# EAGLE board hp6060b v1.5 (EAGLE 9.5.1)
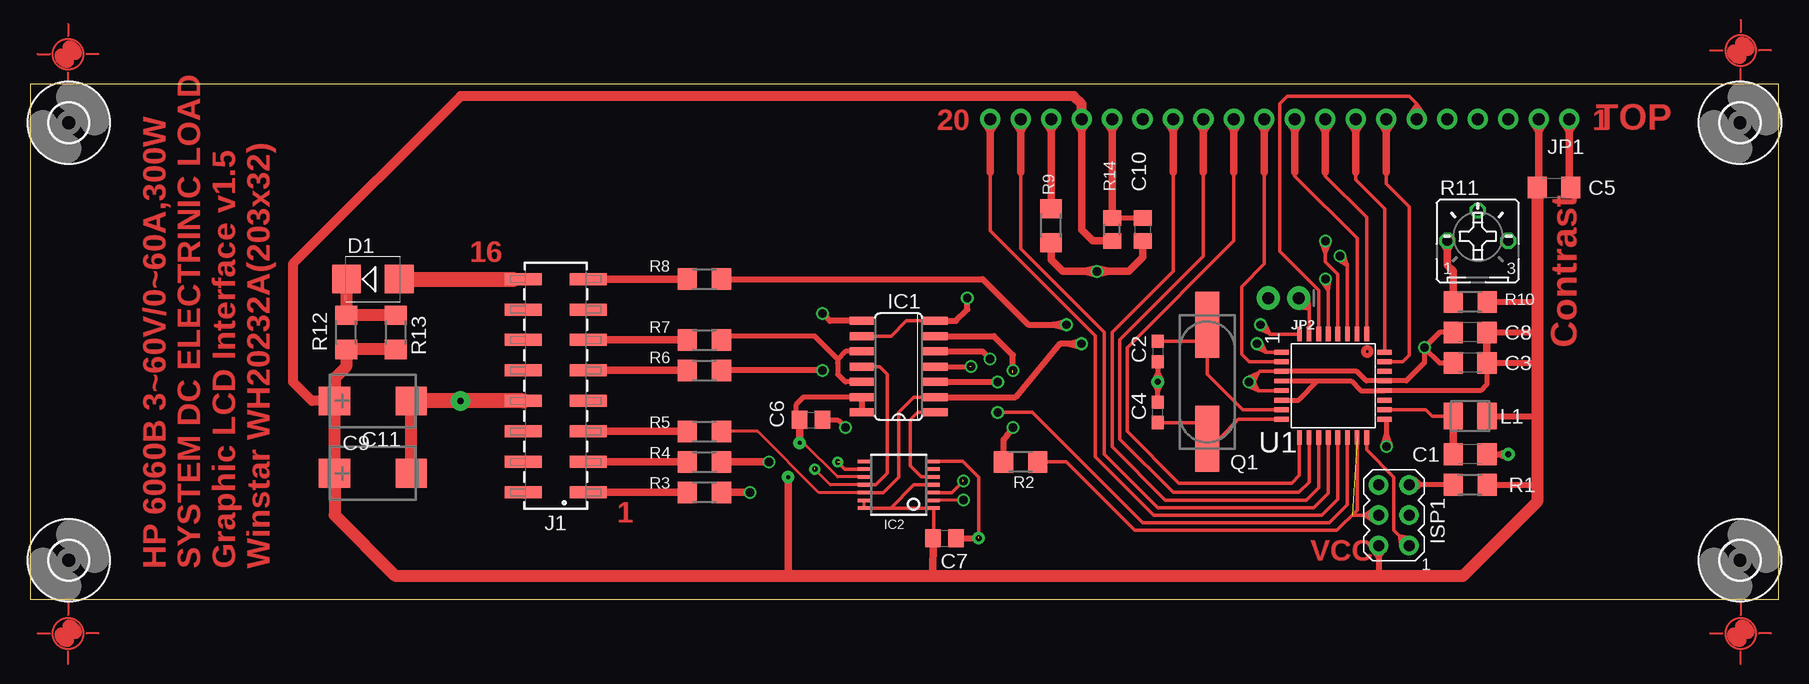
[diagram p0: board, top side]
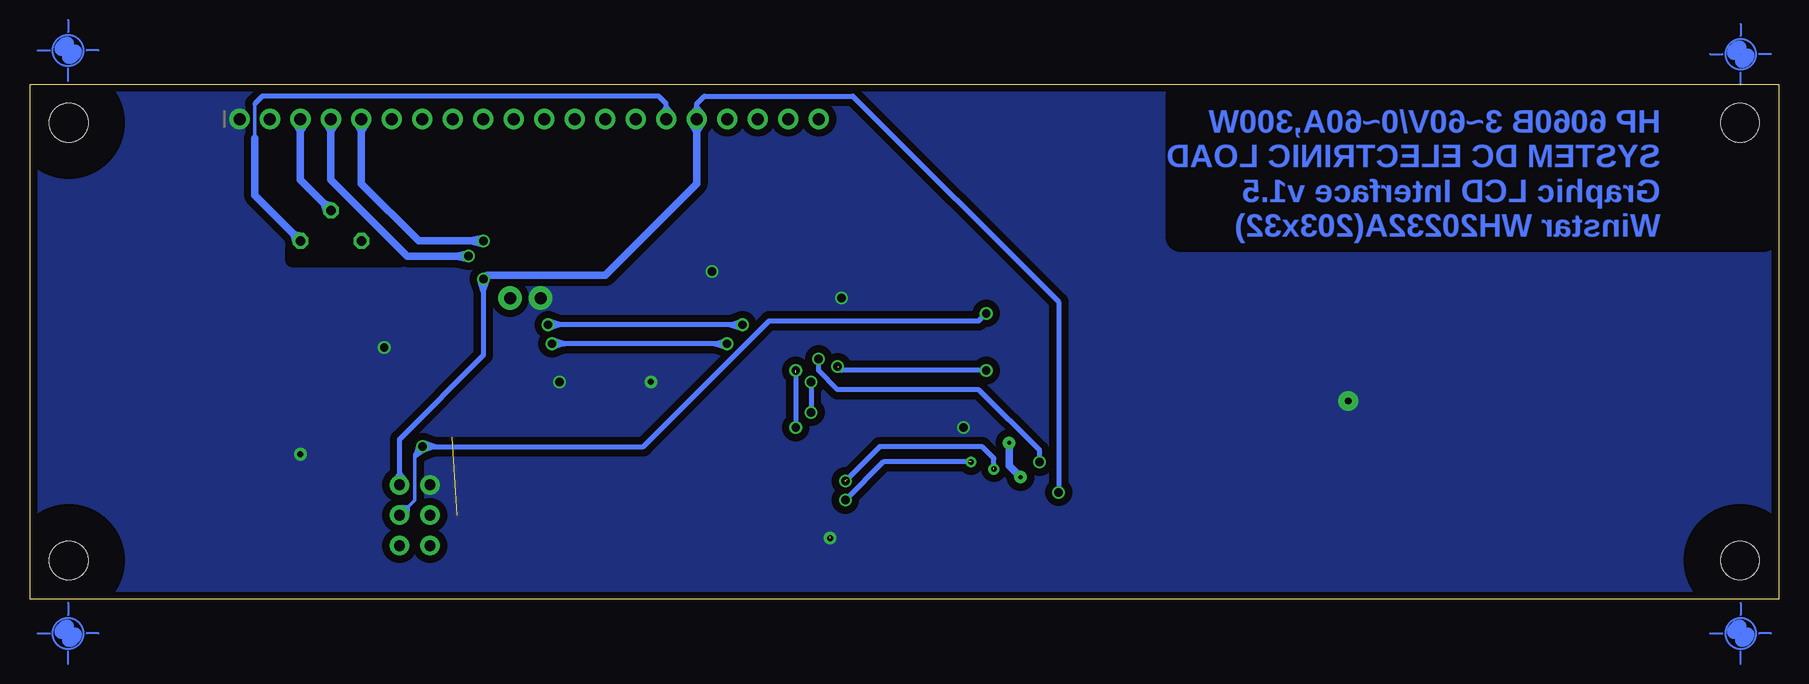
[diagram p1: board, bottom side, seen from below]

Size 145.73 x 42.92 mm. Coordinates in mm from the lower left corner, seen from the top.
Outline: 0,0 145.73,0 145.73,42.92 0,42.92 0,0
Copper layers (1*16): Top 0.035mm / dielectric 1.5mm / Bottom 0.035mm
Design rules "SeeedStudio_2layer_DRU_no_angle_20140221 *": minimum track width 6mil, minimum drill 12mil, track to track 6mil, track to pad 6mil, pad to pad 6mil, via to via 6mil, smd to smd 0mil, copper to edge 10mil, drill to drill 10mil, minimum pad ring 10mil, minimum via ring 6mil, stop-mask expansion 2mil, vias tented up to drill 100mil, thermal gap 10mil
bRestrict: area 114.9,28.3 to 123.8,29.2; area 1.3,30.2 to 49.8,41.9

## Footprints (pad centres in the part's own frame; a part is rotated, then mirrored left to right if it is on the bottom)
C1206 = smd 1.6 x 1.8: 1 -1.4,0; 2 1.4,0
C0603 = smd 1.1 x 1: 1 -0.85,0; 2 0.85,0
C0805 = smd 1.3 x 1.5: 1 -0.95,0; 2 0.95,0
CT7343 = smd 2.6 x 2.4: + -3.2,0; - 3.2,0
DIODE_SMB = smd 2.4 x 2.4: A 2.2,0; C -2.2,0
3,2 = hole 3.2: 0,0
SO14 = smd 0.66 x 2.032: 1 -3.81,-3.073; 2 -2.54,-3.073; 3 -1.27,-3.073; 4 0,-3.073; 5 1.27,-3.073; 6 2.54,-3.073; 7 3.81,-3.073; 8 3.81,3.073; 9 2.54,3.073; 10 1.27,3.073; 11 0,3.073; 12 -1.27,3.073; 13 -2.54,3.073; 14 -3.81,3.073
TSSOP-14 = smd 0.991 x 0.305: 1 -2.918,1.95; 2 -2.918,1.3; 3 -2.918,0.65; 4 -2.918,0; 5 -2.918,-0.65; 6 -2.918,-1.3; 7 -2.918,-1.95; 8 2.918,-1.95; 9 2.918,-1.3; 10 2.918,-0.65; 11 2.918,0; 12 2.918,0.65; 13 2.918,1.3; 14 2.918,1.95
AVRISP = drill 0.9 pad 1.626: 1 -1.27,2.54; 2 1.27,2.54; 3 -1.27,0; 4 1.27,0; 5 -1.27,-2.54; 6 1.27,-2.54
61001621121 = smd 1 x 3.1: 1 -8.89,-2.7; 2 -8.89,2.7; 3 -6.35,-2.7; 4 -6.35,2.7; 5 -3.81,-2.7; 6 -3.81,2.7; 7 -1.27,-2.7; 8 -1.27,2.7; 9 1.27,-2.7; 10 1.27,2.7; 11 3.81,-2.7; 12 3.81,2.7; 13 6.35,-2.7; 14 6.35,2.7; 15 8.89,-2.7; 16 8.89,2.7
1X20_ROUND = drill 1 pad 1.676: 1 -24.13,0; 2 -21.59,0; 3 -19.05,0; 4 -16.51,0; 5 -13.97,0; 6 -11.43,0; 7 -8.89,0; 8 -6.35,0; 9 -3.81,0; 10 -1.27,0; 11 1.27,0; 12 3.81,0; 13 6.35,0; 14 8.89,0; 15 11.43,0; 16 13.97,0; 17 16.51,0; 18 19.05,0; 19 21.59,0; 20 24.13,0
1X02_ROUND = drill 1 pad 1.93: 1 -1.27,0; 2 1.27,0
L3225M = smd 1.6 x 2.2: 1 -1.4,0; 2 1.4,0
CSM-7X-DU = smd 5.5 x 2: 1 -4.75,0; 2 4.75,0
R1206 = smd 1.6 x 1.803: 1 -1.422,0; 2 1.422,0
B25P = drill 0.813 octagon: A -2.54,0; E 2.54,0; S 0,2.54
R0805 = smd 1.3 x 1.5: 1 -0.95,0; 2 0.95,0
LQFP32 = smd 0.4 x 1.2: 1 -2.8,-4.3; 2 -2,-4.3; 3 -1.2,-4.3; 4 -0.4,-4.3; 5 0.4,-4.3; 6 1.2,-4.3; 7 2,-4.3; 8 2.8,-4.3; 17 2.8,4.3; 18 2,4.3; 19 1.2,4.3; 20 0.4,4.3; 21 -0.4,4.3; 22 -1.2,4.3; 23 -2,4.3; 24 -2.8,4.3 | smd 1.2 x 0.4: 9 4.3,-2.8; 10 4.3,-2; 11 4.3,-1.2; 12 4.3,-0.4; 13 4.3,0.4; 14 4.3,1.2; 15 4.3,2; 16 4.3,2.8; 25 -4.3,2.8; 26 -4.3,2; 27 -4.3,1.2; 28 -4.3,0.4; 29 -4.3,-0.4; 30 -4.3,-1.2; 31 -4.3,-2; 32 -4.3,-2.8

## Placement (x,y rotation side)
C1  0.1uF  [C1206]  120.02,12.06 180 top
C2  22pF  [C0603]  93.98,20.64 270 top
C3  0.1uF  [C1206]  120.02,19.68 180 top
C4  22pF  [C0603]  93.98,15.56 90 top
C5  0.1uF  [C1206]  127,34.29 0 top
C6  0.1uF  [C0805]  65.09,14.92 0 top
C7  0.1uF  [C0805]  76.2,5.08 0 top
C8  0.1uF  [C1206]  120.02,22.23 180 top
C9  22uF  [CT7343]  28.57,10.48 0 top
C10  0.1uF  [C0805]  92.71,30.8 270 top
C11  22uF  [CT7343]  28.57,16.51 0 top
D1  [DIODE_SMB]  28.57,26.67 0 top
FID1  PCB_FIDUCIALROUND  [PASS-ROUND]  3.17,-2.86 0 top
FID2  PCB_FIDUCIALROUND  [PASS-ROUND]  3.17,45.4 0 top
FID3  PCB_FIDUCIALROUND  [PASS-ROUND]  142.56,-2.86 0 top
FID4  PCB_FIDUCIALROUND  [PASS-ROUND]  142.56,45.72 0 top
H1  MOUNT-HOLE3.2  [3,2]  3.23,39.69 0 top
H2  MOUNT-HOLE3.2  [3,2]  3.23,3.23 0 top
H3  MOUNT-HOLE3.2  [3,2]  142.5,39.69 0 top
H4  MOUNT-HOLE3.2  [3,2]  142.5,3.23 0 top
IC1  74HC86D  [SO14]  72.39,19.37 90 top
IC2  AHC74  [TSSOP-14]  72.39,9.53 180 top
ISP1  AVRISP-6  [AVRISP]  113.67,6.99 180 top
J1  6060B_DISP  [61001621121]  43.81,17.78 90 top
JP1  WH20232A  [1X20_ROUND]  104.14,40.01 0 bottom
JP2  [1X02_ROUND]  104.46,25.08 180 top
L1  10uH  [L3225M]  120.02,15.24 180 top
Q1  16MHz  [CSM-7X-DU]  98.11,18.1 90 top
R1  10k  [R1206]  120.02,9.53 0 top
R2  1k  [R1206]  82.55,11.43 0 top
R3  0R  [R1206]  56.2,8.89 0 top
R4  2k  [R1206]  56.2,11.43 180 top
R5  2k  [R1206]  56.2,13.97 180 top
R6  2k  [R1206]  56.2,19.05 180 top
R7  2k  [R1206]  56.2,21.59 180 top
R8  2k  [R1206]  56.2,26.67 180 top
R9  120R  [R1206]  85.09,31.11 270 top
R10  10k  [R1206]  120.02,24.77 0 top
R11  5k  [B25P]  120.65,29.84 0 top
R12  100R  [R1206]  26.35,22.23 270 top
R13  100R  [R1206]  30.48,22.23 270 top
R14  120R  [R0805]  90.17,30.8 90 top
U1  IC_ATMEGA8  [LQFP32]  108.58,17.78 270 top

## Library data of the parts
C1 L1 = rcl
C2-C11 = rcl; SPICEPREFIX: C
D1 = eagle-ltspice; SPICEMODEL: NONE; SPICEPREFIX: D; SPICETYPE: diode
FID1-FID4 IC2 U1 = 0My
H1-H4 = holes
IC1 = 74xx-eu
ISP1 = 0adafruit
J1 = Wurth_Connectors_WR-PHD; DATASHEET-URL: https://katalog.we-online.com/em/datasheet/61001621121.pdf; GENDER: Pin Header; IR: 3A; MATES: WR-PHD 2.54mm Angled DualSocket Header/Dual Socket Header/Dual Socket Header Bottom Entry/Dual Socket Header Bottom Entry Large/SMT Dual Socket Header/SMT Dual Socket Header Bottom Entry; PACKAGING: Tube; PART-NUMBER: 61001621121; PINS: 16; ROWS: Dual; TYPE: Straight
JP1 JP2 = 0microbuilder
Q1 = crystal; OC_FARNELL: unknown; OC_NEWARK: unknown
R1-R10 R12-R14 = rcl; SPICEPREFIX: R
R11 = pot

## Nets
!PLCR: J1.1 R3.1
!RESET: C10.1 ISP1.5 JP1.16 R1.1 R3.2 R14.2 U1.29
!SS: IC1.3 U1.14
+5V: C3.1 C5.1 C6.1 C7.1 C8.1 C9.+ C11.+ IC1.13 IC1.14 IC2.1 IC2.4 IC2.10 IC2.13 IC2.14 ISP1.2 JP1.2 JP1.17 L1.1 R1.2 R10.2 R12.2 R13.2 R14.1 U1.4 U1.6 U1.20
AVCC: C1.2 L1.2 U1.18
DCLOCK: IC1.1 IC2.5
GND: C1.1 C2.2 C3.2 C4.2 C5.2 C6.2 C7.2 C8.2 C9.- C10.2 C11.- IC1.7 IC1.9 IC2.7 ISP1.6 J1.8 JP1.1 JP2.2 R9.2 U1.3 U1.5 U1.21
INA: IC1.4 R6.1
ISA: IC1.5 R4.1
K: JP1.18 R9.1
LCD_A0: JP1.4 U1.27
LCD_CS1: JP1.6 U1.30
LCD_CS2: JP1.19 U1.12
LCD_CS3: JP1.20 U1.13
LCD_DB0: JP1.7 U1.23
LCD_DB1: JP1.8 U1.24
LCD_DB2: JP1.9 U1.25
LCD_DB3: JP1.10 U1.26
LCD_DB4: JP1.11 U1.2
LCD_DB5: JP1.12 U1.9
LCD_DB6: JP1.13 U1.10
LCD_DB7: JP1.14 U1.11
LCD_RW: JP1.5 U1.28
MISO: ISP1.1 U1.16
MOSI: ISP1.4 R2.2 U1.15
N$1: IC1.11 IC2.3 IC2.11
N$2: D1.A J1.16
N$3: R10.1 R11.A
N$4: J1.3 R4.2
N$5: J1.5 R5.2
N$6: D1.C R12.1 R13.1
N$9: J1.9 R6.2
N$10: J1.11 R7.2
N$11: IC2.2 IC2.9
N$12: J1.15 R8.2
N$15: IC1.6 R2.1
O1: J1.13
O2: IC1.10 IC1.12 R7.1
PWO: R8.1 U1.32
SCK: IC1.8 ISP1.3 U1.17
SYNC: IC1.2 IC2.12 R5.1 U1.1
TXD: JP2.1 U1.31
VEE: JP1.15 R11.E
VO: JP1.3 R11.S
XTAL1: C2.1 Q1.2 U1.7
XTAL2: C4.1 Q1.1 U1.8

## Tracks (layer width: path | path; a pad name or v marks a point on that pad's centre or on a via)
!PLCR
  Top 0.61: J1.1 R3.1
!RESET  (via drill 0.7 pad 1.05)
  Top 0.254: R1.1 118.11,9.53
  Top 0.305: U1.29 108.19,25.65 | 108.19,25.65 108.19,26.2 | 108.19,26.2 108.19,26.43 v107.95,26.67 | v107.95,26.67 107.69,26.41 | 108.19,26.2 108.3,26.55 v107.95,26.67 | 108.19,26.2 107.83,26.32 v107.95,26.67 | 108.19,25.65 108.32,26.62 v107.95,26.67 | 108.19,25.65 107.64,26.46 v107.95,26.67
  Top 0.406: 118.11,9.53 115.83,9.53 | 115.83,9.53 | 115.83,9.53 ISP1.5 | C10.1 R14.2 | 115.83,9.53 115.35,9.97 | 115.83,9.53 | 115.83,9.53 115.35,9.08 | 115.83,9.53 115.35,9.97 | 115.35,9.97 | ISP1.5 115.35,9.97 | 115.83,9.53 115.35,9.08 | ISP1.5 115.35,9.08 | 115.83,9.53 115.35,9.97 | ISP1.5 115.35,9.97 | 115.83,9.53 115.35,9.08 | ISP1.5 115.35,9.08
  Top 0.61: JP1.16 90.17,39.01 | 90.17,39.01 | 90.17,39.01 R14.2 | 90.17,39.01 90.62,39.72 | 90.17,39.01 | 90.17,39.01 89.72,39.72 | 90.17,39.01 90.62,39.72 | JP1.16 90.62,39.72 | 90.17,39.01 89.72,39.72 | JP1.16 89.72,39.72 | 90.17,39.01 90.62,39.72 | JP1.16 90.62,39.72 | 90.17,39.01 89.72,39.72 | JP1.16 89.72,39.72 | R3.2 v60.01,8.89
  Bottom 0.406: JP1.16 90.17,41.01 | 90.17,41.01 | 90.17,41.01 90.17,41.27 89.53,41.91 77.15,41.91 60.01,24.77 v60.01,8.89 | ISP1.5 114.94,10.43 | 114.94,10.43 | 114.94,10.43 114.94,13.34 107.95,20.32 107.95,25.62 | v107.95,26.67 107.95,26.14 | 107.95,26.14 107.95,25.62 | 107.95,26.14 108.2,26.47 107.99,26.64 v107.95,26.67 | 107.95,26.14 107.7,26.47 v107.95,26.67 | 107.95,25.62 108.26,26.57 v107.95,26.67 | 107.95,25.62 107.64,26.57 v107.95,26.67 | 90.17,41.01 | 90.17,41.01 89.68,40.41 | JP1.16 89.68,40.41 | 90.17,41.01 90.66,40.41 | JP1.16 90.66,40.41 | 90.17,41.01 89.68,40.41 | JP1.16 89.68,40.41 | 90.17,41.01 90.66,40.41 | JP1.16 90.66,40.41 | 90.17,41.01 89.68,40.41 | JP1.16 89.68,40.41 | 90.17,41.01 90.66,40.41 | JP1.16 90.66,40.41 | 114.94,10.43 | 114.94,10.43 115.38,9.94 | 114.94,10.43 114.49,9.94 | 114.49,9.94 | ISP1.5 114.49,9.94 | 114.94,10.43 115.38,9.94 | ISP1.5 115.38,9.94 | 114.94,10.43 114.49,9.94 | ISP1.5 114.49,9.94 | 114.94,10.43 115.38,9.94 | ISP1.5 115.38,9.94
  Bottom 0.61: JP1.16 90.17,39.01 | 90.17,39.01 | 90.17,39.01 90.17,34.61 97.79,26.99 107.64,26.99 107.64,26.98 v107.95,26.67 | 107.99,26.64 v107.96,26.67 v107.95,26.67 | v107.95,26.67 107.9,26.45 | 90.17,39.01 90.62,39.72 | 90.17,39.01 | 90.17,39.01 89.72,39.72 | 90.17,39.01 90.62,39.72 | JP1.16 90.62,39.72 | 90.17,39.01 89.72,39.72 | JP1.16 89.72,39.72 | 90.17,39.01 90.62,39.72 | JP1.16 90.62,39.72 | 90.17,39.01 89.72,39.72 | JP1.16 89.72,39.72
!SS  (via drill 0.7 pad 1.05)
  Top 0.305: U1.14 109.78,7.87 108.27,6.35 92.71,6.35 83.5,15.56 v80.64,15.56
  Top 0.508: IC1.3 v80.64,18.1
  Bottom 0.406: v80.64,18.1 v80.64,15.56
+5V  (via drill 0.35 pad 1.05)
  Top 0.254: 64.14,13.65 C6.1 | v64.14,13.02 64.45,13.02 | v64.14,13.02 64.45,13.02 | 64.45,13.02 67.3,10.18 IC2.10 | IC2.13 IC2.14 IC2.1
  Top 0.305: U1.20 112.63,17.38 | C7.1 75.25,4.76 75.31,4.82 IC2.1 71.44,7.58 | IC2.14 71.71,7.58 73.66,9.53 IC2.4 | 69.37,15.5 IC1.14
  Top 0.406: C3.1 121.42,17.91 120.89,17.38 112.63,17.38 | U1.20 110.89,17.38 110.09,18.18 107.31,18.18 | U1.4 107.31,18.18 | U1.6 105.72,16.58 107.31,18.18 | 87.63,32.38 87.63,30.8 | IC1.13 64.45,16.83 63.82,16.19 63.82,15.24 C6.1
  Top 0.508: IC1.13 IC1.14 | ISP1.2 112.39,3.54 | 112.39,3.54 | 112.39,3.54 112.39,1.91 | R1.2 125.6,9.53 | L1.1 125.6,15.24 | R10.2 125.6,24.77 | C8.1 125.6,22.23 | C3.1 125.6,19.68 | 112.39,3.54 112.83,4.1 | 112.39,3.54 | 112.39,3.54 111.96,4.1 | 112.39,3.54 112.83,4.1 | ISP1.2 112.83,4.1 | 112.39,3.54 111.96,4.1 | ISP1.2 111.96,4.1 | 112.39,3.54 112.83,4.1 | ISP1.2 112.83,4.1 | 112.39,3.54 111.96,4.1 | ISP1.2 111.96,4.1
  Top 0.61: C5.1 125.73,34.42 125.73,39.01 | JP1.2 125.73,39.01 | 125.73,39.01 | C8.1 C3.1 | C7.1 75.25,1.91 | JP1.17 87.63,39.01 | 87.63,39.01 87.63,30.8 88.58,29.85 R14.1 | 125.73,39.01 126.18,39.72 | 125.73,39.01 | 125.73,39.01 125.28,39.72 | 125.73,39.01 126.18,39.72 | JP1.2 126.18,39.72 | 125.73,39.01 125.28,39.72 | JP1.2 125.28,39.72 | 125.73,39.01 126.18,39.72 | JP1.2 126.18,39.72 | 125.73,39.01 125.28,39.72 | JP1.2 125.28,39.72 | 87.63,39.01 88.08,39.72 JP1.17 | 87.63,39.01 87.18,39.72 JP1.17 | C6.1 v64.14,13.02 | v63.18,10.16 63.18,1.91
  Top 0.813: JP1.17 87.63,41.27 87,41.91 35.88,41.91 21.91,27.94 21.91,18.1 23.5,16.51 C11.+
  Top 1.016: C5.1 125.6,24.77 125.6,22.23 125.6,19.68 125.6,15.24 125.6,9.53 125.6,8.12 119.38,1.91 112.39,1.91 75.25,1.91 63.18,1.91 30.48,1.91 25.38,7.01 C9.+ | 25.38,8.89 C9.+ | C9.+ C11.+ | 25.4,16.92 25.4,18.41 26.35,19.37 R12.2 R13.2
  Top 1.27: 25.4,16.92 C11.+
  Bottom 0.61: v64.14,13.02 64.14,11.11 v63.18,10.16
AVCC
  Top 0.305: U1.18 116.3,15.78 116.84,15.24 L1.2
  Top 0.61: L1.2 C1.2
DCLOCK
  Top 0.305: IC1.1 73.98,15.56 73.34,14.92 73.34,11.11 74.28,10.18 IC2.5
GND  (via drill 0.5 pad 1.05, 0.55 pad 1.66, 0.7 pad 1.05)  (1 unrouted)
  Top 0.305: IC1.9 71.75,21.91 73.03,23.18 IC1.7 | IC2.7 77.74,11.47 79.06,10.16 79.06,5.2 | U1.3 102.48,18.98 102.34,18.84 | 102.34,18.84 v101.6,18.1 | U1.5 102.37,17.38 | 102.37,17.38 102.32,17.38 v101.6,18.1 | 102.34,18.84 101.45,18.44 v101.6,18.1 | 102.34,18.84 101.94,17.95 v101.6,18.1 | 102.37,17.38 101.94,18.26 v101.6,18.1 | 102.37,17.38 101.46,17.75 v101.6,18.1
  Top 0.406: U1.3 110.56,18.98 111.36,18.18 U1.21 114.7,18.18 116.2,19.68 v116.2,20.95 | C2.2 93.98,18.85 | 93.98,18.85 v93.98,18.1 | C4.2 93.98,17.35 | 93.98,17.35 v93.98,18.1 | C8.2 117.47,22.23 v116.2,20.95 | C3.2 117.47,19.68 v116.2,20.95 | 93.98,18.85 | 93.98,18.85 93.69,18.24 | v93.98,18.1 93.69,18.24 | 93.98,18.85 | 93.98,18.85 94.27,18.24 | v93.98,18.1 94.27,18.24 | 93.98,17.35 94.27,17.96 | v93.98,18.1 94.27,17.96 | 93.98,17.35 93.69,17.96 | v93.98,18.1 93.69,17.96 | 93.98,18.85 93.69,18.24 | 93.98,18.85 94.27,18.24 | 93.98,18.85 93.69,18.24 | v93.98,18.1 93.69,18.24 | 93.98,18.85 94.27,18.24 | v93.98,18.1 94.27,18.24 | 93.98,17.35 94.27,17.96 | 93.98,17.35 93.69,17.96 | 93.98,17.35 94.27,17.96 | v93.98,18.1 94.27,17.96 | 93.98,17.35 93.69,17.96 | v93.98,18.1 93.69,17.96 | C6.2 67.31,14.92 v67.94,14.29
  Top 0.508: 128.27,34.42 C5.2 | C1.1 122.44,12.06 | 122.44,12.06 v123.19,12.06 | IC1.7 77.15,23.18 78.11,24.13 v78.11,25.08 | 122.44,12.06 123.09,11.81 | v123.19,12.06 123.09,11.81 | 122.44,12.06 123.09,12.32 | v123.19,12.06 123.09,12.32 | 122.44,12.06 123.09,11.81 | 122.44,12.06 123.09,12.32 | 122.44,12.06 123.09,11.81 | v123.19,12.06 123.09,11.81 | 122.44,12.06 123.09,12.32 | v123.19,12.06 123.09,12.32 | C7.2 v79.06,5.08
  Top 0.61: JP1.1 128.27,39.01 | 128.27,39.01 | 128.27,39.01 128.27,34.42 | R9.2 85.09,28.26 86.04,27.3 87.85,27.3 | v88.9,27.3 87.85,27.3 | C10.2 92.71,28.47 91.55,27.3 89.95,27.3 | v88.9,27.3 89.95,27.3 | 87.85,27.3 88.85,27.09 v88.9,27.3 | 87.85,27.3 88.85,27.52 v88.9,27.3 | 89.95,27.3 88.95,27.52 v88.9,27.3 | 89.95,27.3 88.95,27.09 v88.9,27.3 | 128.27,39.01 128.72,39.72 | 128.27,39.01 | 128.27,39.01 127.82,39.72 | 128.27,39.01 128.72,39.72 | JP1.1 128.72,39.72 | 128.27,39.01 127.82,39.72 | JP1.1 127.82,39.72 | 128.27,39.01 128.72,39.72 | JP1.1 128.72,39.72 | 128.27,39.01 127.82,39.72 | JP1.1 127.82,39.72
  Top 1.016: C9.- C11.-
  Top 1.27: J1.8 v35.88,16.51 C11.-
  pour Bottom (isolate 0.61, rank 6, no thermals): -0.64,44.52 147.79,44.52 147.79,-0.59 -0.64,-0.59
INA  (via drill 0.7 pad 1.05)  (1 unrouted)
  Top 0.406: IC1.4 78.33,19.37
  Top 0.508: v66.04,19.05 R6.1
  Bottom 0.406: v66.04,19.05 78.11,19.05 v78.42,19.37
ISA  (via drill 0.7 pad 1.05)
  Top 0.508: IC1.5 79.38,20.64 v80.01,20
  Top 0.61: R4.1 v61.59,11.43
  Bottom 0.406: v80.01,20 80.01,19.05 78.42,17.46 66.67,17.46 61.59,12.38 v61.59,11.43
K
  Top 0.61: JP1.18 85.09,39.01 | 85.09,39.01 R9.1 | 85.09,39.01 85.54,39.72 JP1.18 | 85.09,39.01 84.64,39.72 JP1.18
LCD_A0  (via drill 0.7 pad 1.05)
  Top 0.305: v109.17,28.57 109.54,28.2 | 109.54,28.2 109.78,27.96 109.78,27.72 | 109.78,27.72 U1.27 | 109.54,28.2 109.55,28.57 | 109.54,28.2 109.17,28.2 v109.17,28.57 | 109.78,27.72 109.53,28.67 v109.17,28.57 | 109.78,27.72 108.97,28.26 v109.17,28.57
  Bottom 0.61: JP1.4 120.65,39.01 | 120.65,39.01 | 110.22,28.57 114.3,28.57 120.65,34.92 120.65,39.01 | 110.22,28.57 v109.17,28.57 | 110.22,28.57 109.22,28.79 v109.17,28.57 | 110.22,28.57 109.22,28.36 v109.17,28.57 | 120.65,39.01 121.1,39.72 | 120.65,39.01 | 120.65,39.01 120.2,39.72 | 120.65,39.01 121.1,39.72 | JP1.4 121.1,39.72 | 120.65,39.01 120.2,39.72 | JP1.4 120.2,39.72 | 120.65,39.01 121.1,39.72 | JP1.4 121.1,39.72 | 120.65,39.01 120.2,39.72 | JP1.4 120.2,39.72
LCD_CS1
  Top 0.305: 107.31,22.15 U1.30 107.39,25.74 104.14,28.99 104.14,41.27 104.78,41.91 114.94,41.91 115.57,41.27 115.57,41.01 JP1.6
  Top 0.61: 115.57,41.01 115.12,40.29 JP1.6 116.02,40.29 115.57,41.01
LCD_CS2
  Top 0.305: U1.12 108.19,8.81 107,7.62 93.99,7.62 89.53,12.08 89.53,22.23 82.55,29.21 82.55,35.56
  Top 0.61: JP1.19 82.55,39.01 | 82.55,39.01 | 82.55,39.01 82.55,35.56 | 82.55,39.01 83,39.72 | 82.55,39.01 | 82.55,39.01 82.1,39.72 | 82.55,39.01 83,39.72 | JP1.19 83,39.72 | 82.55,39.01 82.1,39.72 | JP1.19 82.1,39.72 | 82.55,39.01 83,39.72 | JP1.19 83,39.72 | 82.55,39.01 82.1,39.72 | JP1.19 82.1,39.72
LCD_CS3
  Top 0.305: U1.13 108.98,8.34 107.63,6.99 93.66,6.99 88.78,11.87 88.78,21.93 80.01,30.7 80.01,35.56
  Top 0.61: JP1.20 80.01,39.01 | 80.01,39.01 80.01,35.56 | 80.01,39.01 80.46,39.72 JP1.20 | 80.01,39.01 79.56,39.72 JP1.20
LCD_DB0
  Top 0.305: 113.03,19.78 U1.23 114.39,19.78 114.94,20.32 114.94,32.7 113.03,34.61 113.03,35.56
  Top 0.61: JP1.7 113.03,39.01 | 113.03,39.01 | 113.03,39.01 113.03,35.56 | 113.03,39.01 113.48,39.72 | 113.03,39.01 | 113.03,39.01 112.58,39.72 | 113.03,39.01 113.48,39.72 | JP1.7 113.48,39.72 | 113.03,39.01 112.58,39.72 | JP1.7 112.58,39.72 | 113.03,39.01 113.48,39.72 | JP1.7 113.48,39.72 | 113.03,39.01 112.58,39.72 | JP1.7 112.58,39.72
LCD_DB1
  Top 0.305: U1.24 112.89,32.53 110.49,34.92 110.49,35.56
  Top 0.61: JP1.8 110.49,39.01 | 110.49,39.01 | 110.49,39.01 110.49,35.56 | 110.49,39.01 110.94,39.72 | 110.49,39.01 | 110.49,39.01 110.04,39.72 | 110.49,39.01 110.94,39.72 | JP1.8 110.94,39.72 | 110.49,39.01 110.04,39.72 | JP1.8 110.04,39.72 | 110.49,39.01 110.94,39.72 | JP1.8 110.94,39.72 | 110.49,39.01 110.04,39.72 | JP1.8 110.04,39.72
LCD_DB2
  Top 0.305: 107.95,35.56 107.95,35.24 111.39,31.81 U1.25
  Top 0.61: JP1.9 107.95,39.01 | 107.95,39.01 | 107.95,39.01 107.95,35.56 | 107.95,39.01 108.4,39.72 | 107.95,39.01 | 107.95,39.01 107.5,39.72 | 107.95,39.01 108.4,39.72 | JP1.9 108.4,39.72 | 107.95,39.01 107.5,39.72 | JP1.9 107.5,39.72 | 107.95,39.01 108.4,39.72 | JP1.9 108.4,39.72 | 107.95,39.01 107.5,39.72 | JP1.9 107.5,39.72
LCD_DB3
  Top 0.305: U1.26 110.58,30.07 105.41,35.24 105.41,35.56
  Top 0.61: JP1.10 105.41,39.01 | 105.41,39.01 | 105.41,39.01 105.41,35.56 | 105.41,39.01 105.86,39.72 | 105.41,39.01 | 105.41,39.01 104.96,39.72 | 105.41,39.01 105.86,39.72 | JP1.10 105.86,39.72 | 105.41,39.01 104.96,39.72 | JP1.10 104.96,39.72 | 105.41,39.01 105.86,39.72 | JP1.10 105.86,39.72 | 105.41,39.01 104.96,39.72 | JP1.10 104.96,39.72
LCD_DB4
  Top 0.305: 104.26,19.81 U1.2 101.6,19.78 100.97,20.42 100.97,26.04 102.87,27.94 102.87,35.56
  Top 0.61: JP1.11 102.87,39.01 | 102.87,39.01 | 102.87,39.01 102.87,35.56 | 102.87,39.01 103.32,39.72 | 102.87,39.01 | 102.87,39.01 102.42,39.72 | 102.87,39.01 103.32,39.72 | JP1.11 103.32,39.72 | 102.87,39.01 102.42,39.72 | JP1.11 102.42,39.72 | 102.87,39.01 103.32,39.72 | JP1.11 103.32,39.72 | 102.87,39.01 102.42,39.72 | JP1.11 102.42,39.72
LCD_DB5
  Top 0.305: U1.9 105.78,10.3 105.15,9.67 95.74,9.67 91.44,13.97 91.44,20.95 100.33,29.84 100.33,35.56
  Top 0.61: JP1.12 100.33,39.01 | 100.33,39.01 | 100.33,39.01 100.33,35.56 | 100.33,39.01 100.78,39.72 | 100.33,39.01 | 100.33,39.01 99.88,39.72 | 100.33,39.01 100.78,39.72 | JP1.12 100.78,39.72 | 100.33,39.01 99.88,39.72 | JP1.12 99.88,39.72 | 100.33,39.01 100.78,39.72 | JP1.12 100.78,39.72 | 100.33,39.01 99.88,39.72 | JP1.12 99.88,39.72
LCD_DB6
  Top 0.305: U1.10 106.58,9.75 105.73,8.89 95.25,8.89 90.81,13.34 90.81,21.59 97.79,28.57 97.79,35.56
  Top 0.61: JP1.13 97.79,39.01 | 97.79,39.01 | 97.79,39.01 97.79,35.56 | 97.79,39.01 98.24,39.72 | 97.79,39.01 | 97.79,39.01 97.34,39.72 | 97.79,39.01 98.24,39.72 | JP1.13 98.24,39.72 | 97.79,39.01 97.34,39.72 | JP1.13 97.34,39.72 | 97.79,39.01 98.24,39.72 | JP1.13 98.24,39.72 | 97.79,39.01 97.34,39.72 | JP1.13 97.34,39.72
LCD_DB7
  Top 0.305: U1.11 107.39,9.28 106.36,8.26 94.61,8.26 90.17,12.7 90.17,22.23 95.25,27.3 95.25,35.56
  Top 0.61: JP1.14 95.25,39.01 | 95.25,39.01 | 95.25,39.01 95.25,35.56 | 95.25,39.01 95.7,39.72 | 95.25,39.01 | 95.25,39.01 94.8,39.72 | 95.25,39.01 95.7,39.72 | JP1.14 95.7,39.72 | 95.25,39.01 94.8,39.72 | JP1.14 94.8,39.72 | 95.25,39.01 95.7,39.72 | JP1.14 95.7,39.72 | 95.25,39.01 94.8,39.72 | JP1.14 94.8,39.72
LCD_RW  (via drill 0.7 pad 1.05)
  Top 0.305: v107.95,29.84 107.95,29.32 | 107.95,29.32 107.95,28.8 | 107.95,28.8 107.95,28.11 108.98,27.07 U1.28 | 107.95,29.32 108.21,29.58 v107.95,29.84 | 107.95,29.32 107.69,29.58 v107.95,29.84 | 107.95,28.8 108.3,29.71 v107.95,29.84 | 107.95,28.8 107.6,29.71 v107.95,29.84
  Bottom 0.61: JP1.5 118.11,39.01 | 118.11,39.01 | 109,29.84 113.35,29.84 118.11,34.61 118.11,39.01 | 109,29.84 v107.95,29.84 | 109,29.84 108,30.06 v107.95,29.84 | 109,29.84 108,29.63 v107.95,29.84 | 118.11,39.01 118.56,39.72 | 118.11,39.01 | 118.11,39.01 117.66,39.72 | 118.11,39.01 118.56,39.72 | JP1.5 118.56,39.72 | 118.11,39.01 117.66,39.72 | JP1.5 117.66,39.72 | 118.11,39.01 118.56,39.72 | JP1.5 118.56,39.72 | 118.11,39.01 117.66,39.72 | JP1.5 117.66,39.72
MISO
  Top 0.305: U1.16 111.39,12.44 113.67,10.16 113.67,5.71 114.3,5.08 ISP1.1
  Top 0.61: 114.3,5.08 114.44,4.35 ISP1.1 115.03,4.94 114.3,5.08
MOSI  (1 unrouted)
  Top 0.305: U1.15 110.58,7.4 108.9,5.71 92.08,5.71 86.36,11.43 R2.2 | 110.17,6.99 111.5,6.99 | 111.5,6.99 | 111.5,6.99 ISP1.4
  Top 0.61: 111.5,6.99 | 111.5,6.99 112.11,6.57 | ISP1.4 112.11,6.57 | 111.5,6.99 112.11,7.4 | ISP1.4 112.11,7.4 | 111.5,6.99 112.11,6.57 | ISP1.4 112.11,6.57 | 111.5,6.99 112.11,7.4 | ISP1.4 112.11,7.4 | 111.5,6.99 112.11,6.57 | ISP1.4 112.11,6.57 | 111.5,6.99 112.11,7.4 | ISP1.4 112.11,7.4
N$1  (via drill 0.45 pad 0.9, 0.7 pad 1.05)  (3 unrouted)
  Top 0.254: IC2.11 66.71,9.53 v65.41,10.83
  Top 0.305: IC1.11 70.8,19.37 71.44,18.73 71.44,10.48 70.48,9.53 IC2.11 | 77.73,9.79 76.82,8.88 IC2.3
  Bottom 0.406: 65.41,10.93 65.41,11.72 66.38,12.7 74.93,12.7 77.68,9.95
  other vias: 77.79,9.84
N$2
  Top 1.016: J1.16 40.28,26.67 40.24,26.62 | 30.82,26.62 D1.A
  Top 1.27: 40.24,26.62 30.82,26.62
N$3
  Top 0.61: R10.1 118.59,27.34 118.11,27.82 118.11,29.03 | R11.A 118.11,29.03 | 118.11,29.03 118.43,29.69 | 118.43,29.69 | R11.A 118.43,29.69 | 118.11,29.03 117.79,29.69 | R11.A 117.79,29.69 | 118.11,29.03 118.43,29.69 | R11.A 118.43,29.69 | 118.11,29.03 117.79,29.69 | R11.A 117.79,29.69
N$4
  Top 0.61: J1.3 R4.2
N$5
  Top 0.61: J1.5 R5.2
N$6
  Top 1.016: D1.C 26.35,26.65 R12.1 R13.1
N$9
  Top 0.61: J1.9 R6.2
N$10
  Top 0.61: J1.11 R7.2
N$11  (via drill 0.45 pad 0.9, 0.7 pad 1.05)  (1 unrouted)
  Top 0.254: IC2.2 77.76,8.22 v77.79,8.26
  Top 0.305: IC2.9 67.92,10.82 v67.31,11.43
  Bottom 0.406: 67.52,11.43 74.61,11.43 v77.79,8.26
N$12
  Top 0.61: J1.15 R8.2
N$15  (via drill 0.7 pad 1.05)  (1 unrouted)
  Top 0.508: R2.1 81.13,13.29 81.43,13.65 81.6,13.87 v81.92,14.29 | IC1.6 80.33,21.91 81.92,20.32 v81.92,19.05
  Bottom 0.406: 81.92,18.84 v81.92,14.29
O2
  Top 0.406: 67.31,20 65.41,21.91 57.94,21.91 R7.1 | IC1.12 67.94,18.1 67.31,18.73 67.31,19.68 67.31,20 | IC1.10 67.94,20.64 67.31,20
PWO  (via drill 0.7 pad 1.05)
  Top 0.305: U1.32 103.33,22.08 103.3,22.12 | 103.3,22.12 102.92,22.49 | 102.92,22.49 v102.55,22.86 | 102.92,22.49 102.92,22.86 v102.55,22.86 | 102.92,22.49 102.55,22.49 v102.55,22.86 | 103.3,22.12 102.89,23.01 v102.55,22.86 | 103.3,22.12 102.4,22.52 v102.55,22.86
  Top 0.508: R8.1 79.38,26.67 83.19,22.86 85.31,22.86 | 85.31,22.86 85.83,22.86 | 85.83,22.86 v86.36,22.86 | 85.83,22.86 86.22,22.63 v86.36,22.86 | 85.83,22.86 86.22,23.09 v86.36,22.86 | 85.31,22.86 86.29,22.6 v86.36,22.86 | 85.31,22.86 86.29,23.12 v86.36,22.86
  Bottom 0.406: v86.36,22.86 86.89,22.86 | 86.89,22.86 87.41,22.86 | 87.41,22.86 101.5,22.86 | 101.5,22.86 102.03,22.86 | 102.03,22.86 102.36,22.61 v102.55,22.86 | 102.03,22.86 102.36,23.11 v102.55,22.86 | 86.89,22.86 86.56,23.11 v86.36,22.86 | 86.89,22.86 86.56,22.61 v86.36,22.86 | 101.5,22.86 102.45,22.55 v102.55,22.86 | 101.5,22.86 102.45,23.17 v102.55,22.86 | 87.41,22.86 86.46,23.17 v86.36,22.86 | 87.41,22.86 86.46,22.55 v86.36,22.86
SCK  (via drill 0.7 pad 1.05)
  Top 0.406: v113.03,12.7 112.89,12.85 | U1.17 113.03,14.84 113.03,13.75 | 113.03,13.75 113.03,13.22 | 113.03,13.22 v113.03,12.7 | 113.03,13.22 112.78,12.9 v113.03,12.7 | 113.03,13.22 113.28,12.9 v113.03,12.7 | 113.03,13.75 112.72,12.8 v113.03,12.7 | 113.03,13.75 113.34,12.8 v113.03,12.7
  Top 0.508: IC1.8 66.67,23.18 v66.04,23.81
  Bottom 0.305: 114.3,7.62 113.67,8.26 113.67,11.86 | 113.67,11.86 113.67,12.06 113.4,12.33 | 113.67,11.86 113.39,12.8 v113.03,12.7 112.83,12.38 113.67,11.86
  Bottom 0.406: v113.03,12.7 112.5,12.7 | 112.5,12.7 111.98,12.7 | 111.98,12.7 94.61,12.7 84.14,23.18 66.67,23.18 v66.04,23.81 | ISP1.3 114.3,7.62 | 113.4,12.33 v113.03,12.7 | 112.5,12.7 112.83,12.45 v113.03,12.7 | 112.5,12.7 112.83,12.95 v113.03,12.7 | 113.4,12.33 113.35,12.74 v113.03,12.7 | 113.4,12.33 112.99,12.38 v113.03,12.7 | 111.98,12.7 112.93,12.39 v113.03,12.7 | 111.98,12.7 112.93,13.01 v113.03,12.7 | 114.3,7.62 114.33,6.96 ISP1.3 | 114.3,7.62 114.96,7.59 ISP1.3
SYNC  (via drill 0.7 pad 1.05)
  Top 0.254: IC2.12 65.74,8.88 60.64,13.97 R5.1
  Top 0.305: U1.1 103.02,20.58 | 103.02,20.58 102.93,20.58 102.61,20.9 | 102.61,20.9 v102.23,21.27 | IC2.12 71.11,8.88 72.39,10.16 72.39,15.56 73.66,16.83 76.2,16.83 | 102.61,20.9 102.61,21.27 v102.23,21.27 | 102.61,20.9 102.24,20.9 v102.23,21.27 | 103.02,20.58 102.56,21.45 v102.23,21.27 | 103.02,20.58 102.11,20.92 v102.23,21.27
  Top 0.406: 76.2,16.83 74.93,16.83
  Top 0.508: IC1.2 76.2,16.83 82.13,16.83 85.83,21.27 86.58,21.27 | v87.63,21.27 86.58,21.27 | 86.58,21.27 87.56,21.01 v87.63,21.27 | 86.58,21.27 87.56,21.53 v87.63,21.27
  Bottom 0.406: v102.23,21.27 101.71,21.27 | 101.71,21.27 102.04,21.02 v102.23,21.27 | 101.71,21.27 102.04,21.53 v102.23,21.27 | v87.63,21.27 88.68,21.27 | 88.68,21.27 101.19,21.27 | 101.19,21.27 101.92,21.27 101.93,21.27 | 101.19,21.27 102.14,20.97 v102.23,21.27 | 101.19,21.27 102.14,21.58 v102.23,21.27 | 88.68,21.27 87.73,21.58 v87.63,21.27 | 88.68,21.27 87.73,20.97 v87.63,21.27
TXD
  Top 0.305: U1.31 106.58,24.23 106.44,24.38 JP2.1
  Top 0.61: 106.44,24.38 106.39,25.12 JP2.1 105.69,24.42 106.44,24.38
VEE
  Bottom 0.305: 127,41.27 127,38.42
  Bottom 0.406: JP1.15 92.71,41.01 | 92.71,41.01 | 92.71,41.01 92.71,41.27 93.34,41.91 126.36,41.91 127,41.27 | 92.71,41.01 | 92.71,41.01 92.22,40.41 | JP1.15 92.22,40.41 | 92.71,41.01 93.2,40.41 | JP1.15 93.2,40.41 | 92.71,41.01 92.22,40.41 | JP1.15 92.22,40.41 | 92.71,41.01 93.2,40.41 | JP1.15 93.2,40.41 | 92.71,41.01 92.22,40.41 | JP1.15 92.22,40.41 | 92.71,41.01 93.2,40.41 | JP1.15 93.2,40.41
  Bottom 0.61: 127,38.42 127,33.66 123.77,30.42 | R11.E 123.77,30.42 | 123.77,30.42 123.07,30.18 R11.E | 123.77,30.42 123.53,29.73 R11.E
VO
  Bottom 0.61: JP1.3 123.19,39.01 | 123.19,39.01 | 123.19,39.01 123.19,34.92 121.22,32.96 | 121.22,32.96 R11.S | 123.19,39.01 123.64,39.72 | 123.19,39.01 | 123.19,39.01 122.74,39.72 | 123.19,39.01 123.64,39.72 | JP1.3 123.64,39.72 | 123.19,39.01 122.74,39.72 | JP1.3 122.74,39.72 | 123.19,39.01 123.64,39.72 | JP1.3 123.64,39.72 | 123.19,39.01 122.74,39.72 | JP1.3 122.74,39.72 | 121.22,32.96 120.53,32.72 R11.S | 121.22,32.96 120.99,32.27 R11.S
XTAL1
  Top 0.305: U1.7 101.06,15.78 98.11,18.73 Q1.2 98.11,21.58 98.02,21.49 C2.1
XTAL2
  Top 0.305: U1.8 100.7,14.98 99.06,13.34 98.11,13.34 | 98.11,13.34 97.79,13.34 97.79,14.71 C4.1 | 98.11,13.34 Q1.1
(copper drawn outside any net)
  shapes: Top circle x1

## Text on the board
Top: TOP | 20 | 1 | 16 | Contrast | 1 | HP 6060B 3~60V/0~60A,300W / SYSTEM DC ELECTRINIC LOAD / Graphic LCD Interface v1.5 / Winstar WH20232A(203x32) | VCC
Bottom: HP 6060B 3~60V/0~60A,300W / SYSTEM DC ELECTRINIC LOAD / Graphic LCD Interface v1.5 / Winstar WH20232A(203x32)